# EAGLE board Transmitter_11-16 (EAGLE 8.4.0)
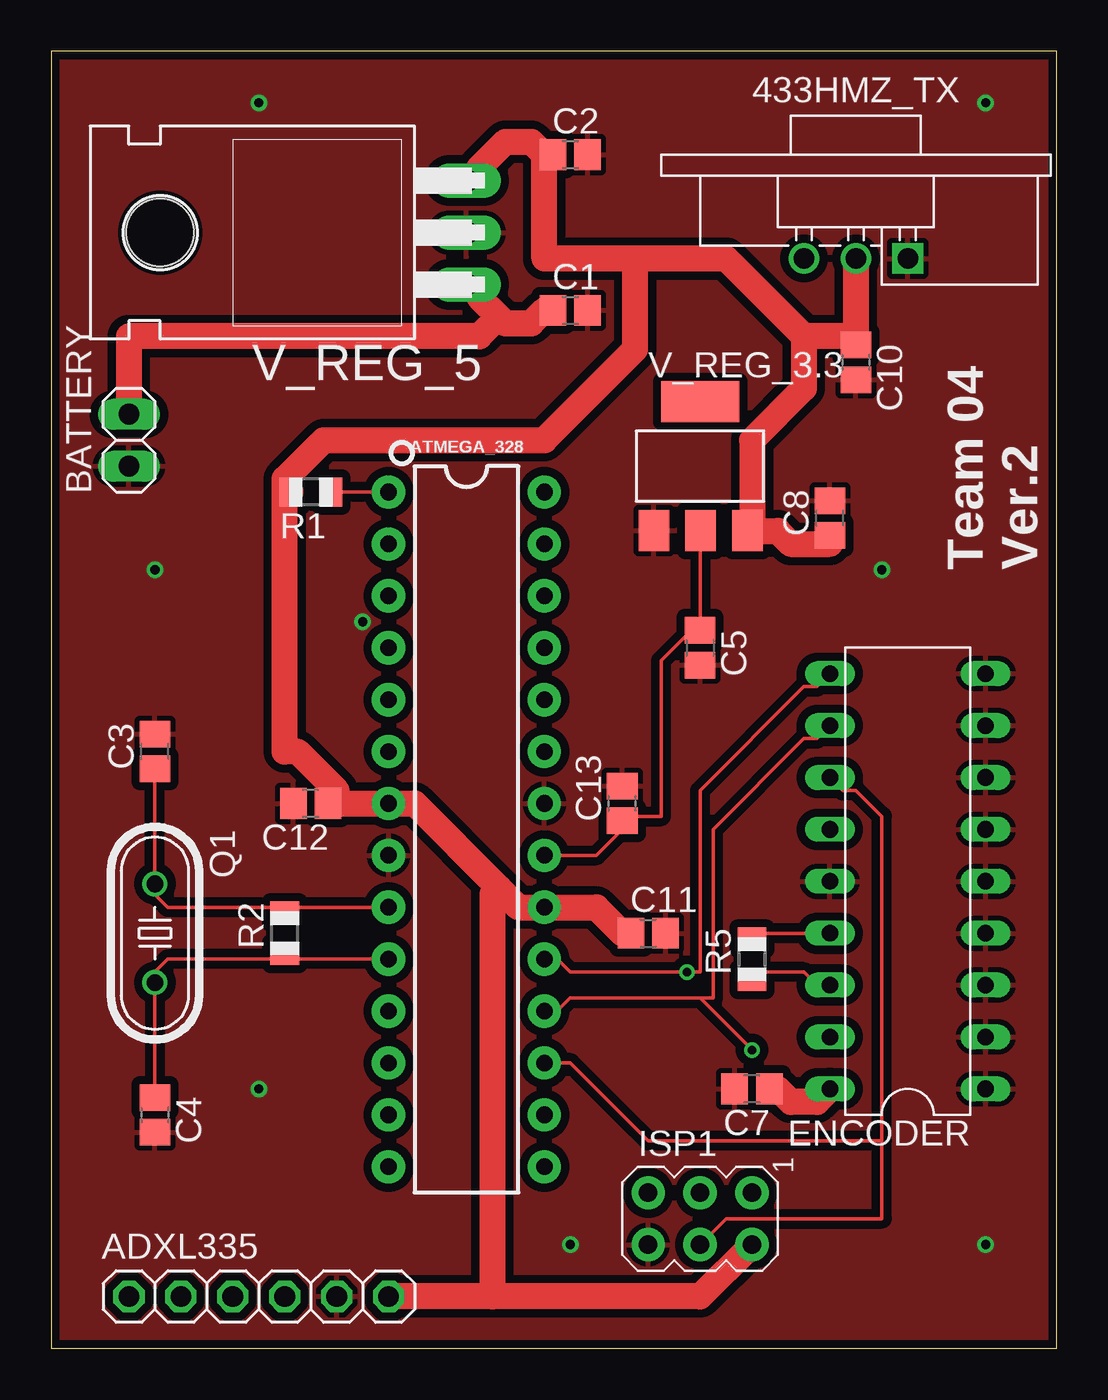
[diagram p0: board, top side]
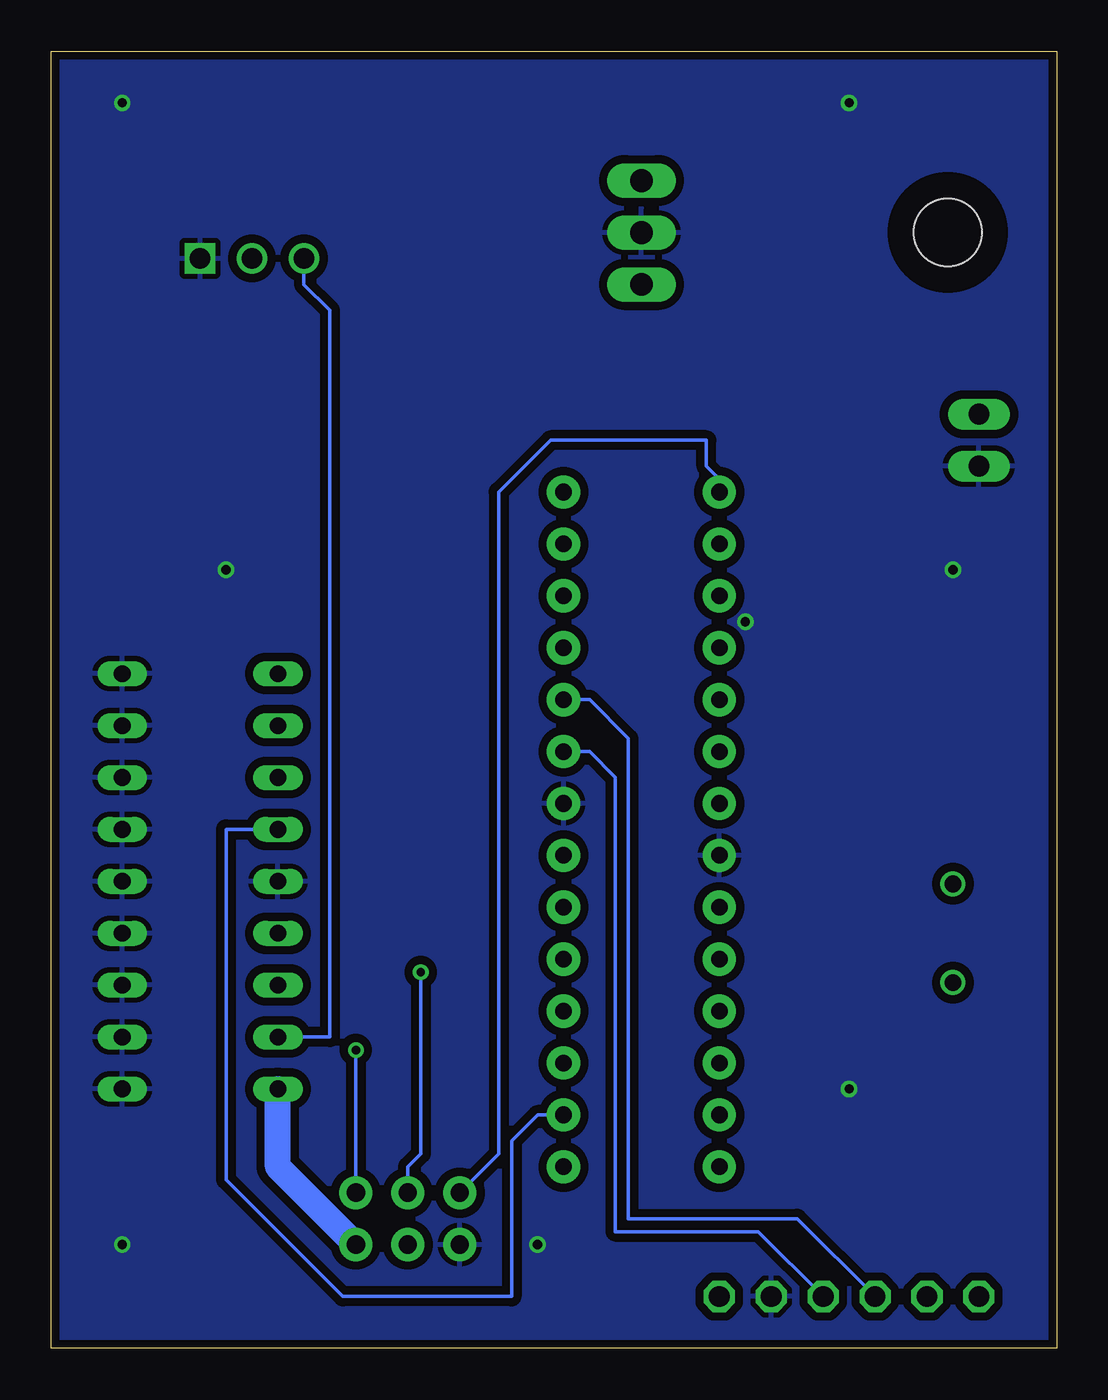
[diagram p1: board, bottom side, seen from below]

Size 49.2 x 63.49 mm. Coordinates in mm from the lower left corner, seen from the top.
Outline: 0,0 49.2,0 49.2,63.49 0,63.49 0,0
Copper layers (1*16): Top 0.0356mm / dielectric 1.5011mm / Bottom 0.0356mm
Design rules "LaenPCBOrder": minimum track width 6mil, minimum drill 13mil, track to track 6mil, track to pad 6mil, pad to pad 6mil, via to via 6mil, smd to smd 6mil, copper to edge 15mil, drill to drill 6mil, minimum pad ring 7mil, minimum via ring 7mil, stop-mask expansion 3mil, vias tented up to drill 0mil, thermal gap 10mil
Net classes: 0 default: width 0.178 mm, drill 0.406 mm, clearance 0.203 mm; 1 Supply: width 1.27 mm, drill 0.406 mm, clearance 0.203 mm to class 0, clearance 0.203 mm

## Footprints (pad centres in the part's own frame; a part is rotated, then mirrored left to right if it is on the bottom)
WIRELESS-XY-FST#V = drill 1 square: 1 2.54,0 | drill 1: 2 0,0; 3 -2.54,0
1X06 = drill 1.016 octagon: 1 -6.35,0; 2 -3.81,0; 3 -1.27,0; 4 1.27,0; 5 3.81,0; 6 6.35,0
DIP28 = drill 0.813 pad 1.626: 1 -16.51,-3.81; 2 -13.97,-3.81; 3 -11.43,-3.81; 4 -8.89,-3.81; 5 -6.35,-3.81; 6 -3.81,-3.81; 7 -1.27,-3.81; 8 1.27,-3.81; 9 3.81,-3.81; 10 6.35,-3.81; 11 8.89,-3.81; 12 11.43,-3.81; 13 13.97,-3.81; 14 16.51,-3.81; 15 16.51,3.81; 16 13.97,3.81; 17 11.43,3.81; 18 8.89,3.81; 19 6.35,3.81; 20 3.81,3.81; 21 1.27,3.81; 22 -1.27,3.81; 23 -3.81,3.81; 24 -6.35,3.81; 25 -8.89,3.81; 26 -11.43,3.81; 27 -13.97,3.81; 28 -16.51,3.81
1X02 = drill 1.016 long: 1 -1.27,0; 2 1.27,0
C0805 = smd 1.3 x 1.5: 1 -0.85,0; 2 0.85,0
18-DIP-A = drill 0.813 long: 1 -10.16,-3.81; 2 -7.62,-3.81; 3 -5.08,-3.81; 4 -2.54,-3.81; 5 0,-3.81; 6 2.54,-3.81; 7 5.08,-3.81; 8 7.62,-3.81; 9 10.16,-3.81; 10 10.16,3.81; 11 7.62,3.81; 12 5.08,3.81; 13 2.54,3.81; 14 0,3.81; 15 -2.54,3.81; 16 -5.08,3.81; 17 -7.62,3.81; 18 -10.16,3.81
AVRISP = drill 0.9 pad 1.626: 1 -1.27,2.54; 2 1.27,2.54; 3 -1.27,0; 4 1.27,0; 5 -1.27,-2.54; 6 1.27,-2.54
HC49/S = drill 0.813: 1 -2.413,0; 2 2.413,0
R0805 = smd 1.1 x 1.4: 1 -1,0; 2 1,0
SOT223 = smd 1.499 x 2.007: 1 -2.261,-3.15; 2 0.025,-3.15; 3 2.311,-3.15 | smd 3.81 x 2.007: 4 0,3.15
TO220H = drill 1.118 long: 1 -2.54,-10.16; 2 0,-10.16; 3 2.54,-10.16 | hole 3.302: 0,4.826

## Placement (x,y rotation side)
433HMZ_TX  WIRELESS-XY-FST#V  [WIRELESS-XY-FST#V]  39.37,53.34 0 top
ADXL335  [1X06]  10.16,2.54 0 top
ATMEGA_328  328P  [DIP28]  20.32,25.4 270 top
BATTERY  [1X02]  3.81,44.45 90 top
C1  10u  [C0805]  25.4,50.8 0 top
C2  10u  [C0805]  25.4,58.42 0 top
C3  22p  [C0805]  5.08,29.21 90 top
C4  22p  [C0805]  5.08,11.43 270 top
C5  10u  [C0805]  31.75,34.29 270 top
C7  0.1u  [C0805]  34.29,12.7 180 top
C8  10u  [C0805]  38.1,40.64 90 top
C10  0.1u  [C0805]  39.37,48.26 270 top
C11  0.1u  [C0805]  29.21,20.32 0 top
C12  0.1u  [C0805]  12.7,26.67 180 top
C13  0.1u  [C0805]  27.94,26.67 90 top
ENCODER  HT12E"  [18-DIP-A]  41.91,22.86 90 top
ISP1  AVRISP-6  [AVRISP]  31.75,6.35 270 top
Q1  16MHz  [HC49/S]  5.08,20.32 270 top
R1  10k  [R0805]  12.7,41.91 180 top
R2  1M  [R0805]  11.43,20.32 90 top
R5  750K  [R0805]  34.29,19.05 90 top
V_REG_3.3  REG1117  [SOT223]  31.75,43.18 0 top
V_REG_5  7805T  [TO220H]  10.16,54.61 90 top

## Library data of the parts
433HMZ_TX = diy-modules
ADXL335 C1-C5 C7 C8 C10-C13 ISP1 R1 R2 R5 = adafruit
ATMEGA_328 = SparkFun-IC-Microcontroller; PROD_ID: IC-09136
BATTERY = pinhead
ENCODER = holtek
Q1 = crystal
V_REG_3.3 = burr-brown; MPN: REG1117; OC_FARNELL: 1097566; OC_NEWARK: 14P6981
V_REG_5 = linear

## Nets
+5V [Supply]: 433HMZ_TX.2 ADXL335.6 ATMEGA_328.7 ATMEGA_328.20 C2.1 C7.1 C8.1 C10.1 C11.1 C12.1 ENCODER.18 ISP1.2 R1.2 V_REG_3.3.3 V_REG_5.3
AD08: ATMEGA_328.19 ENCODER.10 ISP1.3
GND: 433HMZ_TX.1 ADXL335.5 ATMEGA_328.8 ATMEGA_328.22 BATTERY.1 C1.2 C2.2 C3.2 C4.2 C5.2 C7.2 C8.2 C10.2 C11.2 C12.2 C13.2 ENCODER.1 ENCODER.2 ENCODER.3 ENCODER.4 ENCODER.5 ENCODER.6 ENCODER.7 ENCODER.8 ENCODER.9 ENCODER.14 ISP1.6 V_REG_3.3.1 V_REG_5.2
N$1: ATMEGA_328.9 C3.1 Q1.1 R2.2
N$2: ATMEGA_328.18 ENCODER.11 ISP1.1
N$3: ADXL335.4 ATMEGA_328.23
N$4: ATMEGA_328.10 C4.1 Q1.2 R2.1
N$5: ENCODER.16 R5.1
N$6: ENCODER.15 R5.2
N$7: 433HMZ_TX.3 ENCODER.17
N$8: ATMEGA_328.16 ENCODER.13
N$9: ATMEGA_328.17 ENCODER.12 ISP1.4
N$11: ADXL335.3 ATMEGA_328.24
N$19: ATMEGA_328.21 C5.1 C13.1 V_REG_3.3.2
RESET: ATMEGA_328.1 ISP1.5 R1.1
VCC [Supply]: BATTERY.2 C1.1 V_REG_5.1

## Tracks (layer width: path | path; a pad name or v marks a point on that pad's centre or on a via)
+5V
  Top 1.27: 24.13,58.42 23.5,59.05 22.23,59.05 20.95,57.78 20.95,57.15 V_REG_5.3 | C8.1 38.1,39.37 36.2,39.37 35.56,40.01 34.29,40.01 V_REG_3.3.3 34.29,40.64 34.29,44.45 36.83,46.99 36.83,49.53 | 433HMZ_TX.2 39.37,49.53 | 39.37,49.53 36.83,49.53 | 39.37,49.53 C10.1 | 24.13,58.42 24.13,53.34 28.57,53.34 | 28.57,53.34 33.02,53.34 36.83,49.53 | 24.13,58.42 C2.1 | ENCODER.18 37.47,12.06 36.2,12.06 35.56,12.7 C7.1 | 21.59,2.54 31.75,2.54 ISP1.2 | 21.59,2.54 ADXL335.6 | C11.1 27.94,20.32 26.67,21.59 ATMEGA_328.20 22.86,21.59 21.91,22.54 | 11.43,41.91 11.43,29.21 12.06,29.21 13.97,27.3 13.97,26.67 | 13.97,26.67 ATMEGA_328.7 17.78,26.67 21.91,22.54 | 13.97,26.67 C12.1 | 21.59,2.54 21.59,22.23 21.91,22.54 | 28.57,53.34 28.57,48.9 24.13,44.45 13.34,44.45 11.43,42.55 11.43,41.91 | 11.43,41.91 R1.2
  Bottom 1.27: ENCODER.18 38.1,8.89 ISP1.2
AD08  (via drill 0.41)
  Top 0.178: ENCODER.10 37.47,32.38 36.83,32.38 31.75,27.3 31.75,18.41 v31.11,18.41 25.4,18.41 24.77,19.05 ATMEGA_328.19
  Bottom 0.178: ISP1.3 31.75,8.89 31.11,9.53 v31.11,18.41
GND  (via drill 0.45)
  other vias: 15.24,35.56 40.64,38.1 5.08,38.1 10.16,12.7 45.72,5.08 25.4,5.08 45.72,60.96 10.16,60.96
  pour Bottom (isolate 0.406): 0,63.5 0,0 50.8,0 50.8,63.5
  pour Top (isolate 0.406): 0,63.5 0,0 48.26,0 50.8,0 50.8,63.5
N$1
  Top 0.178: C3.1 Q1.1 5.08,22.23 5.71,21.59 11.43,21.59 | ATMEGA_328.9 11.43,21.59 | 11.43,21.59 R2.2
N$2  (via drill 0.41)
  Top 0.178: ENCODER.11 37.47,29.84 36.83,29.84 32.38,25.4 32.38,17.14 31.75,17.14 | 31.75,17.14 25.4,17.14 24.77,16.51 ATMEGA_328.18 | 31.75,17.14 v34.29,14.61
  Bottom 0.178: v34.29,14.61 ISP1.1
N$3
  Bottom 0.178: ADXL335.4 14.61,5.71 21.59,5.71 21.59,27.94 22.86,29.21 ATMEGA_328.23
N$4
  Top 0.178: C4.1 Q1.2 5.08,18.41 5.71,19.05 11.43,19.05 | ATMEGA_328.10 11.43,19.05 | 11.43,19.05 R2.1
N$5
  Top 0.178: ENCODER.16 37.47,17.78 36.83,18.41 34.29,18.41 R5.1
N$6
  Top 0.178: ENCODER.15 34.29,20.32 R5.2
N$7
  Bottom 0.178: ENCODER.17 35.56,15.24 35.56,50.8 36.83,52.07 433HMZ_TX.3
N$8
  Bottom 0.178: ENCODER.13 40.64,25.4 40.64,8.26 34.92,2.54 26.67,2.54 26.67,10.16 25.4,11.43 ATMEGA_328.16
N$9
  Top 0.178: ENCODER.12 38.73,27.3 39.37,27.3 40.64,26.04 40.64,10.16 | 40.64,10.16 40.64,6.35 33.02,6.35 ISP1.4 | ATMEGA_328.17 25.4,13.97 29.21,10.16 40.64,10.16
N$11
  Bottom 0.178: ADXL335.3 12.7,6.35 20.95,6.35 20.95,29.84 22.86,31.75 ATMEGA_328.24
N$19
  Top 0.178: V_REG_3.3.2 31.75,40.01 C5.1 31.75,34.92 31.11,34.92 29.84,33.66 29.84,26.04 27.94,26.04 C13.1 27.94,25.4 26.67,24.13 ATMEGA_328.21
RESET
  Top 0.178: ATMEGA_328.1 R1.1
  Bottom 0.178: ISP1.5 27.3,9.53 27.3,41.91 24.77,44.45 17.14,44.45 17.14,43.18 16.51,42.55 ATMEGA_328.1
VCC
  Top 1.27: 21.91,50.48 20.95,51.44 20.95,52.07 V_REG_5.1 | 21.91,50.48 22.23,50.16 23.5,50.16 24.13,50.8 C1.1 | 21.91,50.48 20.95,49.53 3.81,49.53 BATTERY.2

## Text on the board
tPlace: Team 04 / Ver.2